# Altium PCB PCB1.PcbDoc
Units mm, origin at the board's own origin, x right, y up, seen from the top; angles counter-clockwise.
Board outline 50 x 38.99 mm, 2 copper layers (Top Layer, Bottom Layer), stack 1.569 mm thick; 10 components, 6 nets, 27 pads, 0 vias.
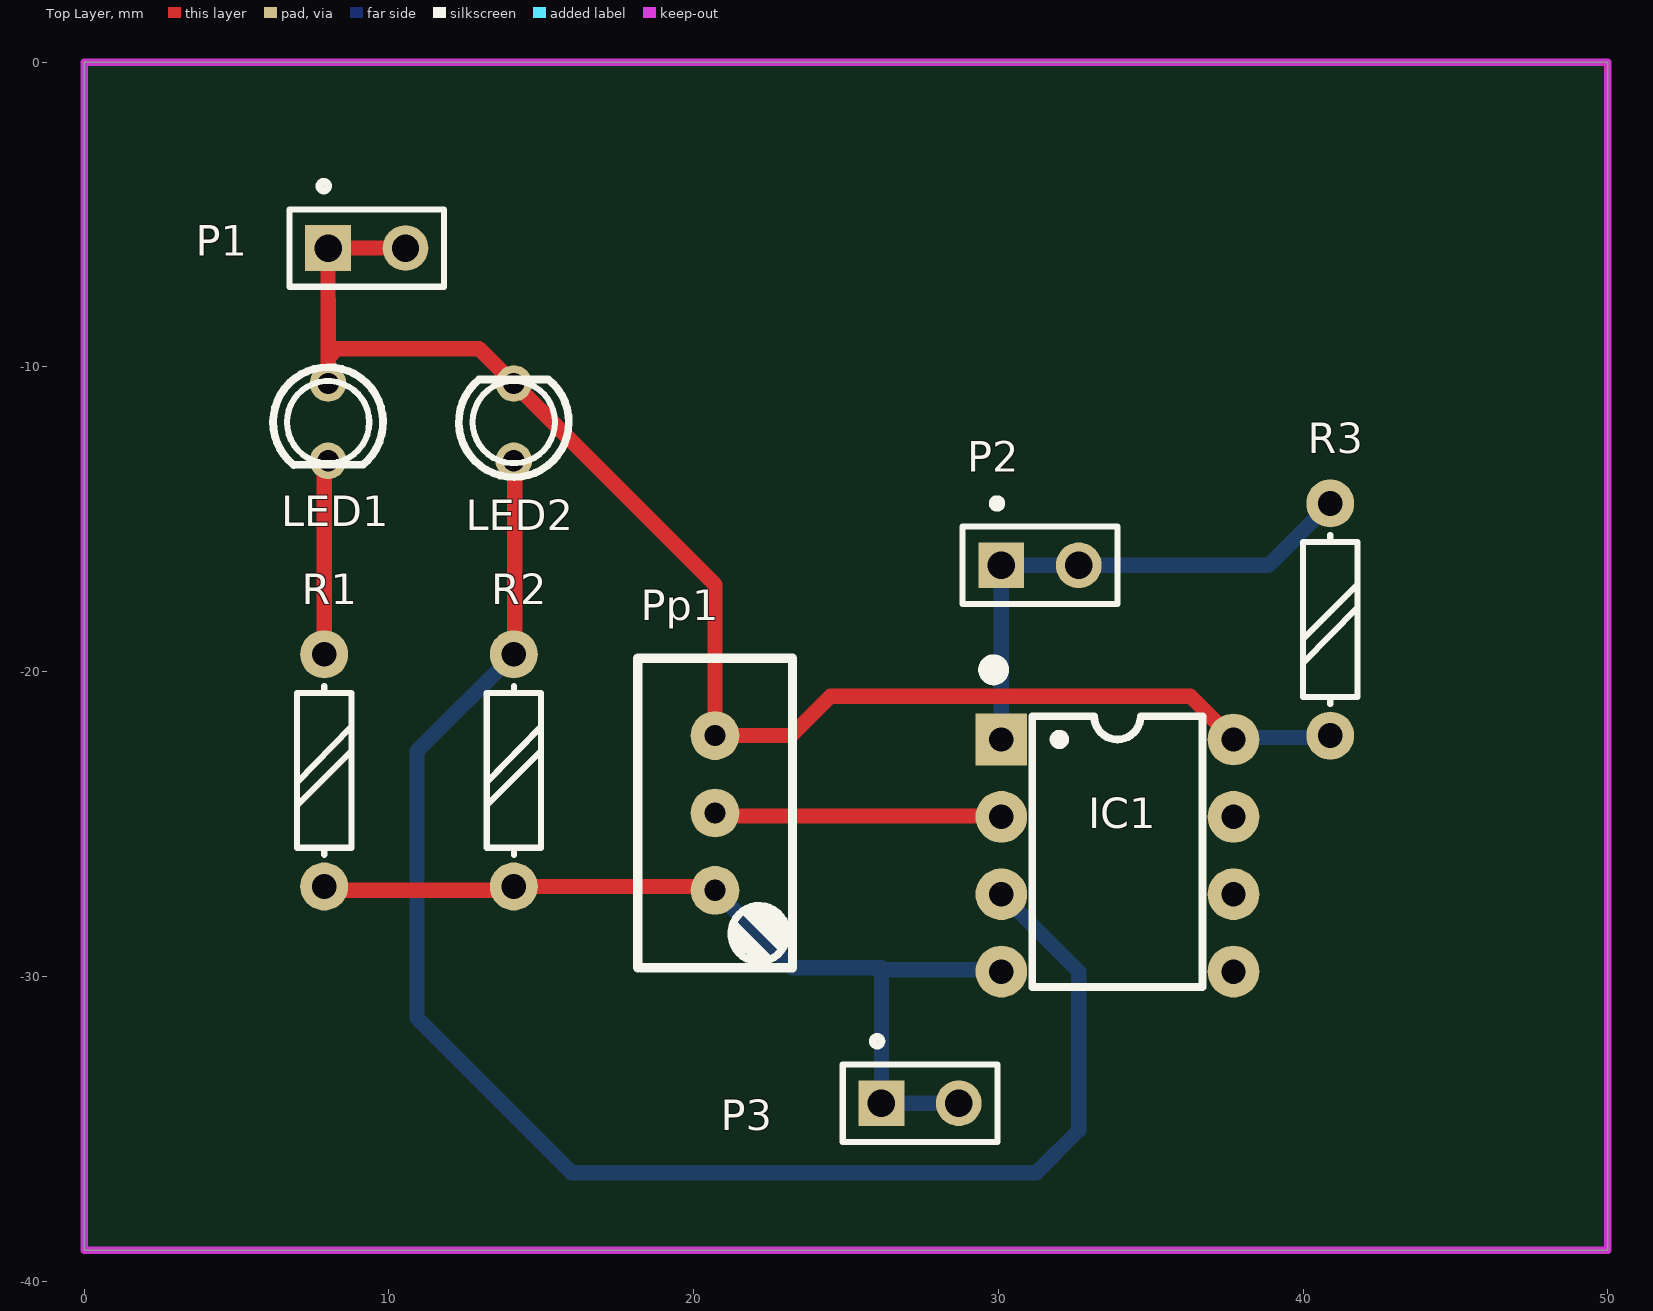
[diagram p0: Top Layer view]
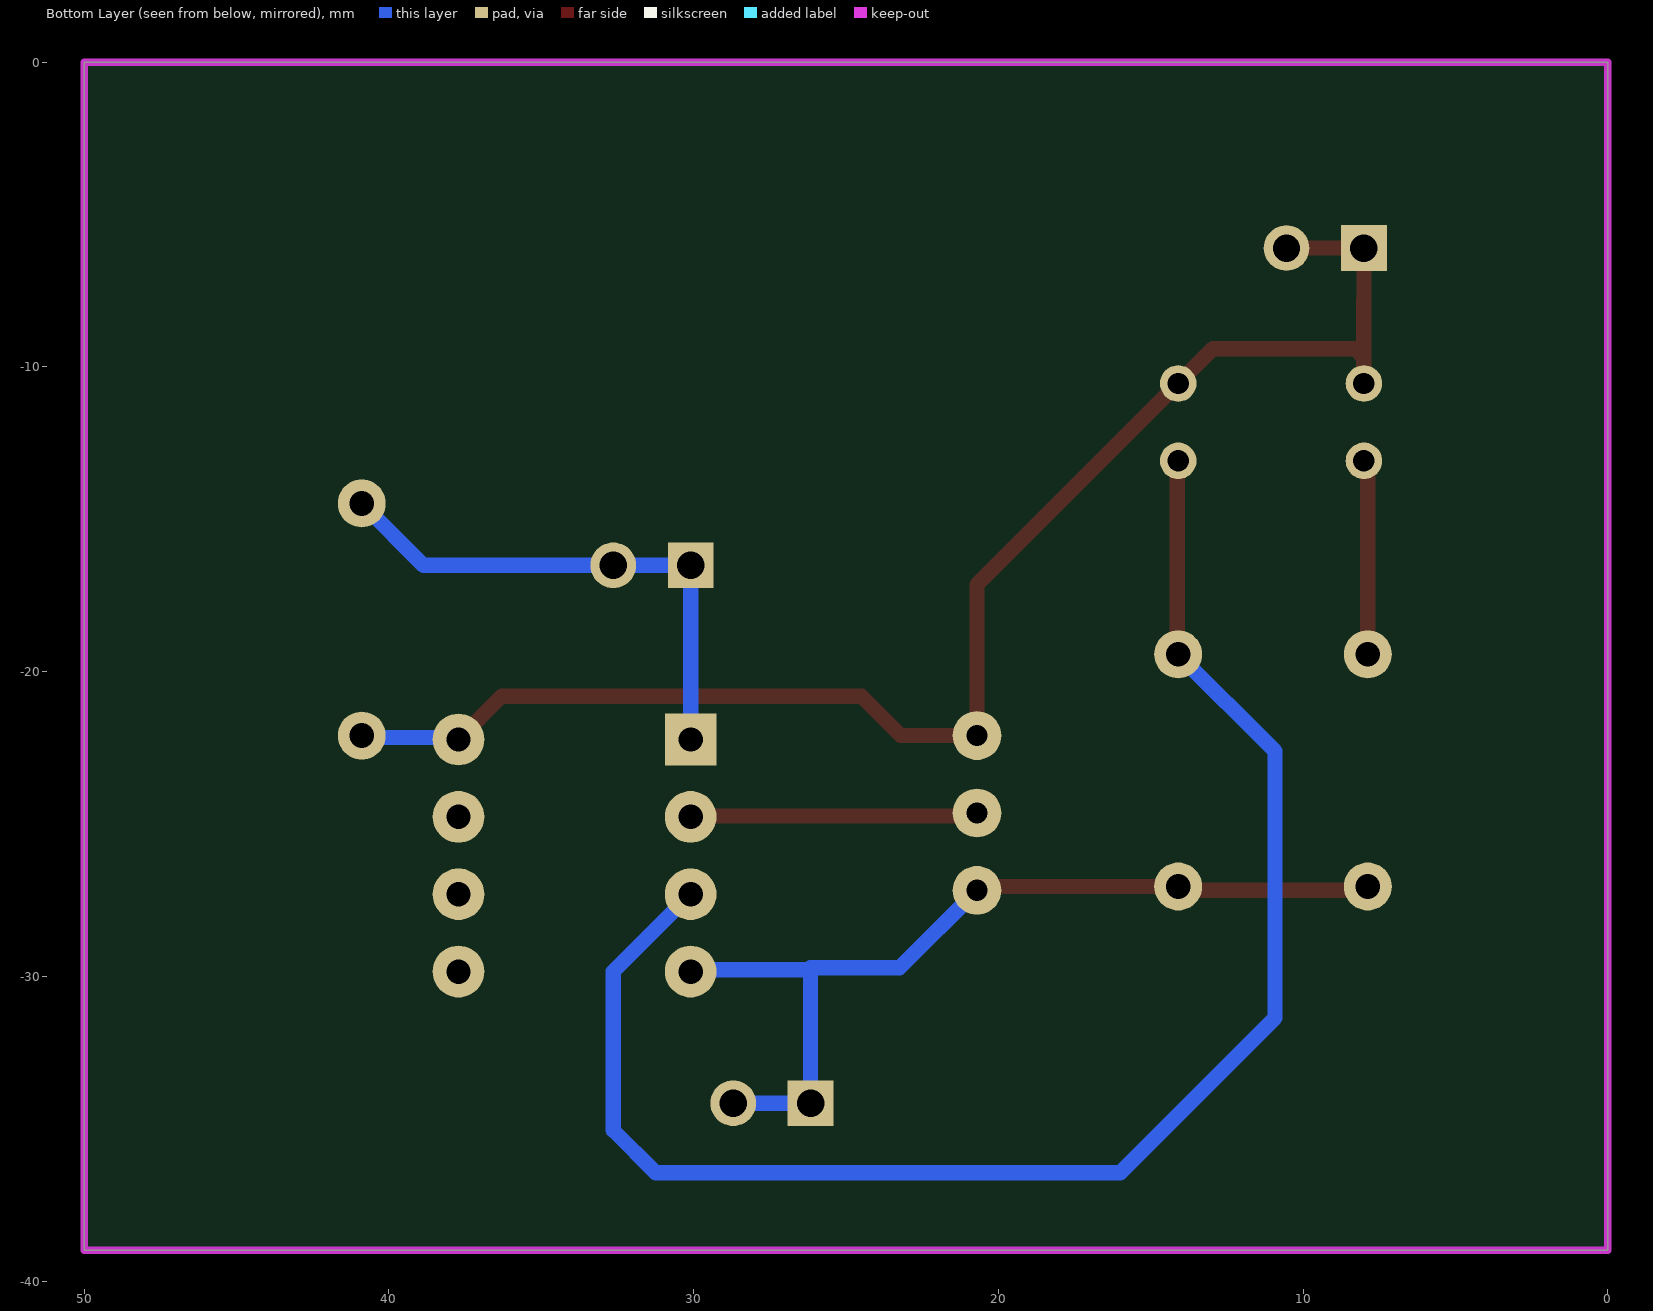
[diagram p1: Bottom Layer view, seen from below]
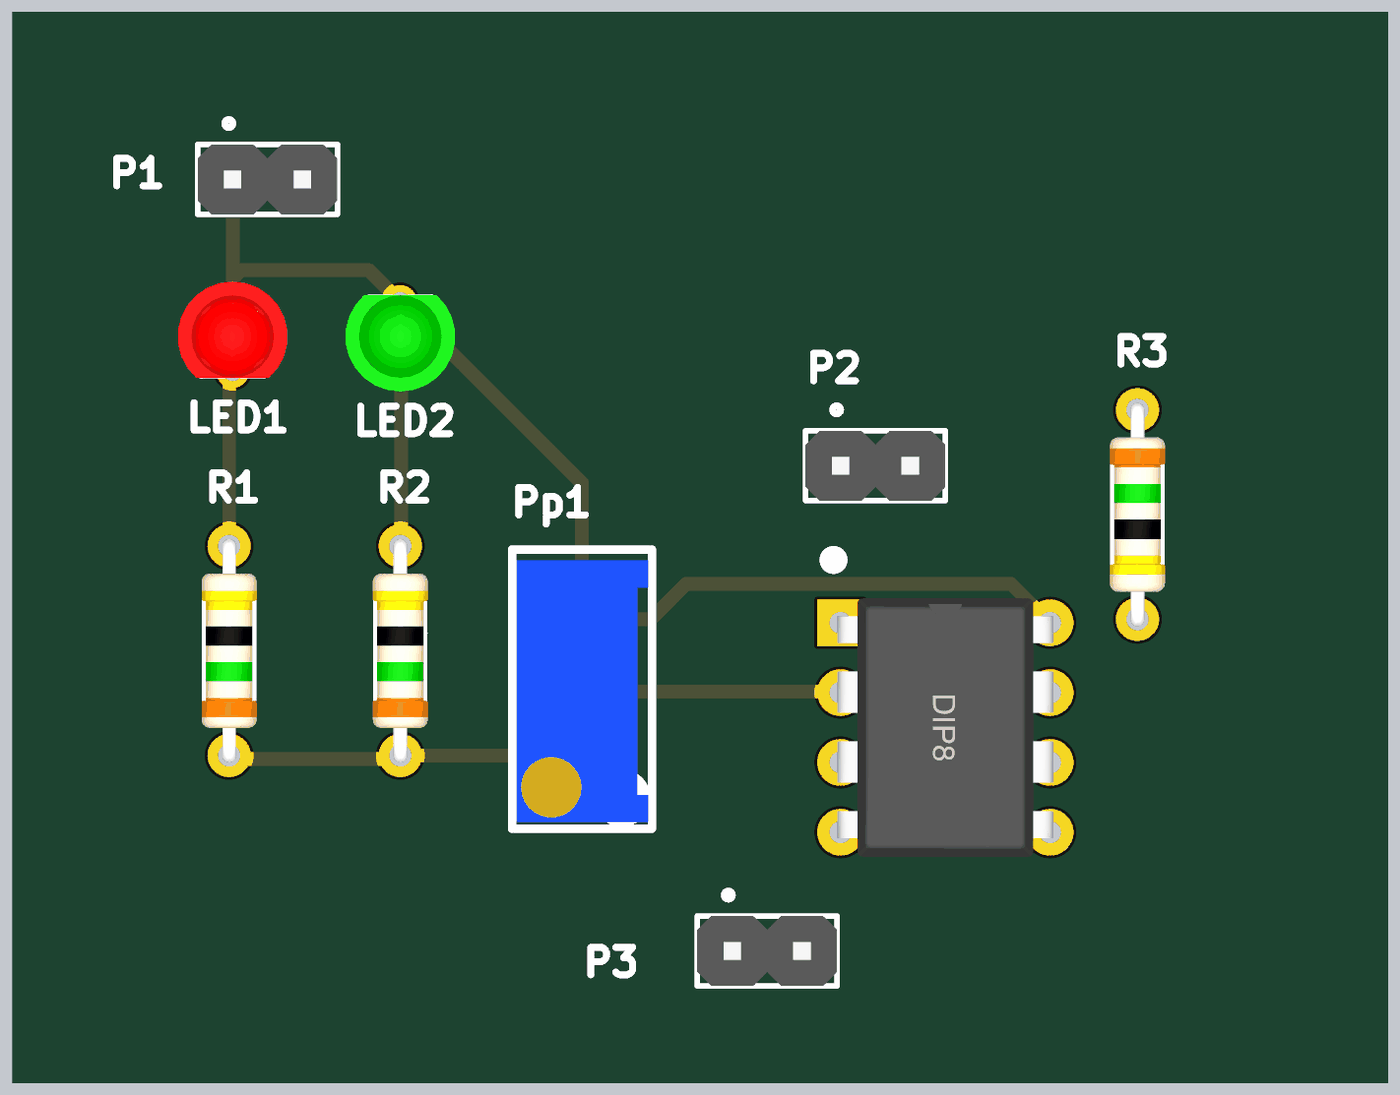
[diagram p2: 3D render of the assembled board from above, using the file's embedded part models]

## Layer stack, top to bottom
Top Solder: solder mask 0.0254, SM-001, Dk 4
Top Layer: signal copper 0.035
Dielectric 1: core 1.4986, Core-043, Dk 4.3
Bottom Layer: signal copper 0.035
Bottom Solder: solder mask 0.0254, SM-001, Dk 4

## Board outline
0,-38.989 50,-38.989 50,0 0,0

## Design rules (kind name [scope] priority, off if disabled: settings)
Clearance [All] p1: gap=0.254 ignorepadtopadclearanceinfootprint=FALSE except(0: Arc-Hole Track-Hole SMDPad-Hole THPad-Hole Via-Hole Fill-Hole Poly-Hole Region-Hole Text-Hole)
PolygonConnect [All] p1: connectstyle=Relief reliefconductorwidth=0.254 reliefentries=4 polygonreliefangle="90 Angle" airgapwidth=0.254
RoutingVias [All] p1: holewidth=0.711 width=1.27 viastyle="Through Hole" minholewidth=0.711 minwidth=1.27 maxholewidth=0.711 maxwidth=1.27
SolderMaskExpansion [All] p1: expansion=0.102 istentingtop=FALSE
Width [All] p1: maxlimit=0.5 minlimit=0.5 preferedwidth=0.5 minimp=50.000000 maximp=50.000000 favimp=50.000000
30 further rules are at their usual default settings.

## Components (designator, comment, footprint, x,y, rotation, side; value= is the part's Value field where it differs from the comment)
IC1 "LM393" DIP8-300 33.909,-26.035 r0 top
LED1 "LED-3-R" LED-R3-H5-SINGLE-R 8.001,-10.541 r270 top
LED2 "LED-3-G" LED-R3-H5-SINGLE-G 14.097,-13.081 r90 top
P1 "Header 2" HDR1X2 8.001,-6.096 r0 top
P2 "Header 2" HDR1X2 30.099,-16.51 r0 top
P3 "Header 2" HDR1X2 26.162,-34.163 r0 top
Pp1 "10k" RP_3296 20.701,-27.178 r180 top
R1 "Resistor" AXIAL-0.3 7.874,-27.051 r90 top value=150
R2 "Resistor" AXIAL-0.3 14.097,-27.051 r90 top value=10k
R3 "Resistor" AXIAL-0.3 40.894,-14.478 r270 top value=10k

## Footprints (in the part's own frame and the unit in brackets; to place one, negate y for a bottom-side part, rotate by r counter-clockwise, add the part's x,y. Pads: shape width x height; smd on the part's side, far side on the other; paste and mask are expansions set on the pad)
AXIAL-0.3 [mil] "1/8W电阻"
  round 62 hole 32: 1(0,0) 2(300,0)
  silkscreen extent 41,-35 259,35, body extent -10,-39 310,39, height 89
DIP8-300 [mm] "9.4*7.6*3.8(长宽高）"
  rect 1.7x1.7 hole 0.8: 1(-3.81,3.81)
  round 1.7 hole 0.8: 2(-3.81,1.27) 3(-3.81,-1.27) 4(-3.81,-3.81) 5(3.81,-3.81) 6(3.81,-1.27) 7(3.81,1.27) 8(3.81,3.81)
  silkscreen extent -4.32,-4.32 2.79,6.35, body extent -3.93,-4.7 3.93,4.7, height 4.5
HDR1X2 [mm] "Connector; Header; 2 Position"
  rect 1.5x1.5 hole 0.9: 1(0,0)
  round 1.5 hole 0.9: 2(2.54,0)
  silkscreen extent -1.27,-1.27 3.81,2.17, body extent -1.27,-1.27 3.81,1.27, height 8.54
LED-R3-H5-SINGLE-G [mm]
  round 1.2 hole 0.7: 1(0,0) 2(2.54,0)
  silkscreen extent -0.53,-1.8 2.68,1.8, body extent -0.73,-2 2.79,2, height 5.2
LED-R3-H5-SINGLE-R [mm]
  round 1.2 hole 0.7: 1(0,0) 2(2.54,0)
  silkscreen extent -0.53,-1.8 2.68,1.8, body extent -0.73,-2 2.79,2, height 5.2
RP_3296 [mm] "电位器"
  round 1.6 hole 0.7: 1(0,0) 2(0,-2.54) 3(0,-5.08)
  silkscreen extent -2.54,-7.62 2.54,2.54, body extent -2.41,-7.23 2.39,2.3, height 11.55

## Part data
IC1: "双路电压比较", BOM名称=双路电压比较, 学习资源=www.ooocke.com, 版权归属=源创客
LED1 LED2: "Typical INFRARED GaAs LED", Published=8-Jun-2000, Publisher="Altium Limited", Revision="July-2002: Re-released for DXP Platform."
P1 P2 P3: "Header, 2-Pin", LatestRevisionDate=17-Jul-2002, LatestRevisionNote="Re-released for DXP Platform.", Publisher="Altium Limited"
Pp1: library part RP_3296, "3296电位器", 购买链接=https://item.taobao.com/item.htm?spm=a230r.1.14.90.21641e34zQj3ul&id=19303265869&ns=1&abbucket=13#detail
R1 R2 R3: Published=8-Jun-2000, Publisher="Altium Limited", Revision="July-2002: Re-released for DXP Platform."

## Nets (pads, with @x,y where several pads share a name; then routed paths per layer and width w, separated by ;. In a path a pad name is that pad's centre, name@x,y a point inside that pad or via, vN(x,y) a via of type N, cw(c..) or ccw(c..) an arc to the next point about the centre after c; other vN are vias at no path point)
NetIC1_1: IC1.1 P2.1 P2.2 R3.1 | length 17.4
  Bottom Layer w0.5: IC1.1 P2.1 P2.2 38.862,-16.51 R3.1
NetIC1_2: IC1.2 Pp1.2 | length 9.5
  Top Layer w0.5: Pp1.2 20.798,-24.735 30.069,-24.735 IC1.2
NetIC1_3: IC1.3 LED2.1 R2.2 | length 52.8
  Top Layer w0.5: R2.2 14.126,-19.402 14.126,-13.11 LED2.1
  Bottom Layer w0.5: R2.2 10.922,-22.606 10.922,-31.369 16.002,-36.449 31.242,-36.449 32.639,-35.052 32.639,-29.845 IC1.3
NetIC1_4: IC1.4 P3.1 P3.2 Pp1.1 R1.1 R2.1 | length 30.5
  Top Layer w0.5: R1.1 8.001,-27.178 13.97,-27.178 R2.1 20.574,-27.051 Pp1.1
  Bottom Layer w0.5: Pp1.1 23.241,-29.718 26.162,-29.718 ; P3.2 P3.1 26.162,-29.718 ; IC1.4 30.035,-29.781 26.226,-29.781 26.162,-29.718
NetIC1_8: IC1.8 LED1.1 LED2.2 P1.1 P1.2 Pp1.3 R3.2 | length 49.3
  Top Layer w0.5: LED1.1 8.008,-10.534 8.008,-9.684 ; P1.2 P1.1 8.001,-7.769 8.008,-7.777 8.008,-9.684 ; IC1.8 36.301,-20.807 24.493,-20.807 23.202,-22.098 Pp1.3 20.701,-17.145 LED2.2 12.954,-9.398 8.294,-9.398 8.008,-9.684
  Bottom Layer w0.5: IC1.8 37.782,-22.162 40.831,-22.162 R3.2
NetLED1_2: LED1.2 R1.2 | length 6.4
  Top Layer w0.5: R1.2 7.874,-13.208 LED1.2
pads on no net: IC1.5 IC1.6 IC1.7

## Keep-outs
Keep-Out Layer:
  the board outline again, w0.254